# Altium PCB ASIC_test_adapter.PcbDoc
Units mm, origin at the board's own origin, x right, y up, seen from the top; angles counter-clockwise.
Board outline 49.2 x 49.2 mm, 4 copper layers (Top Layer, Layer 1, Layer 2, Bottom Layer), stack 1.539 mm thick; 19 components, 71 nets, 185 pads, 97 vias.
Unrouted connection lines stored in the file: 57.
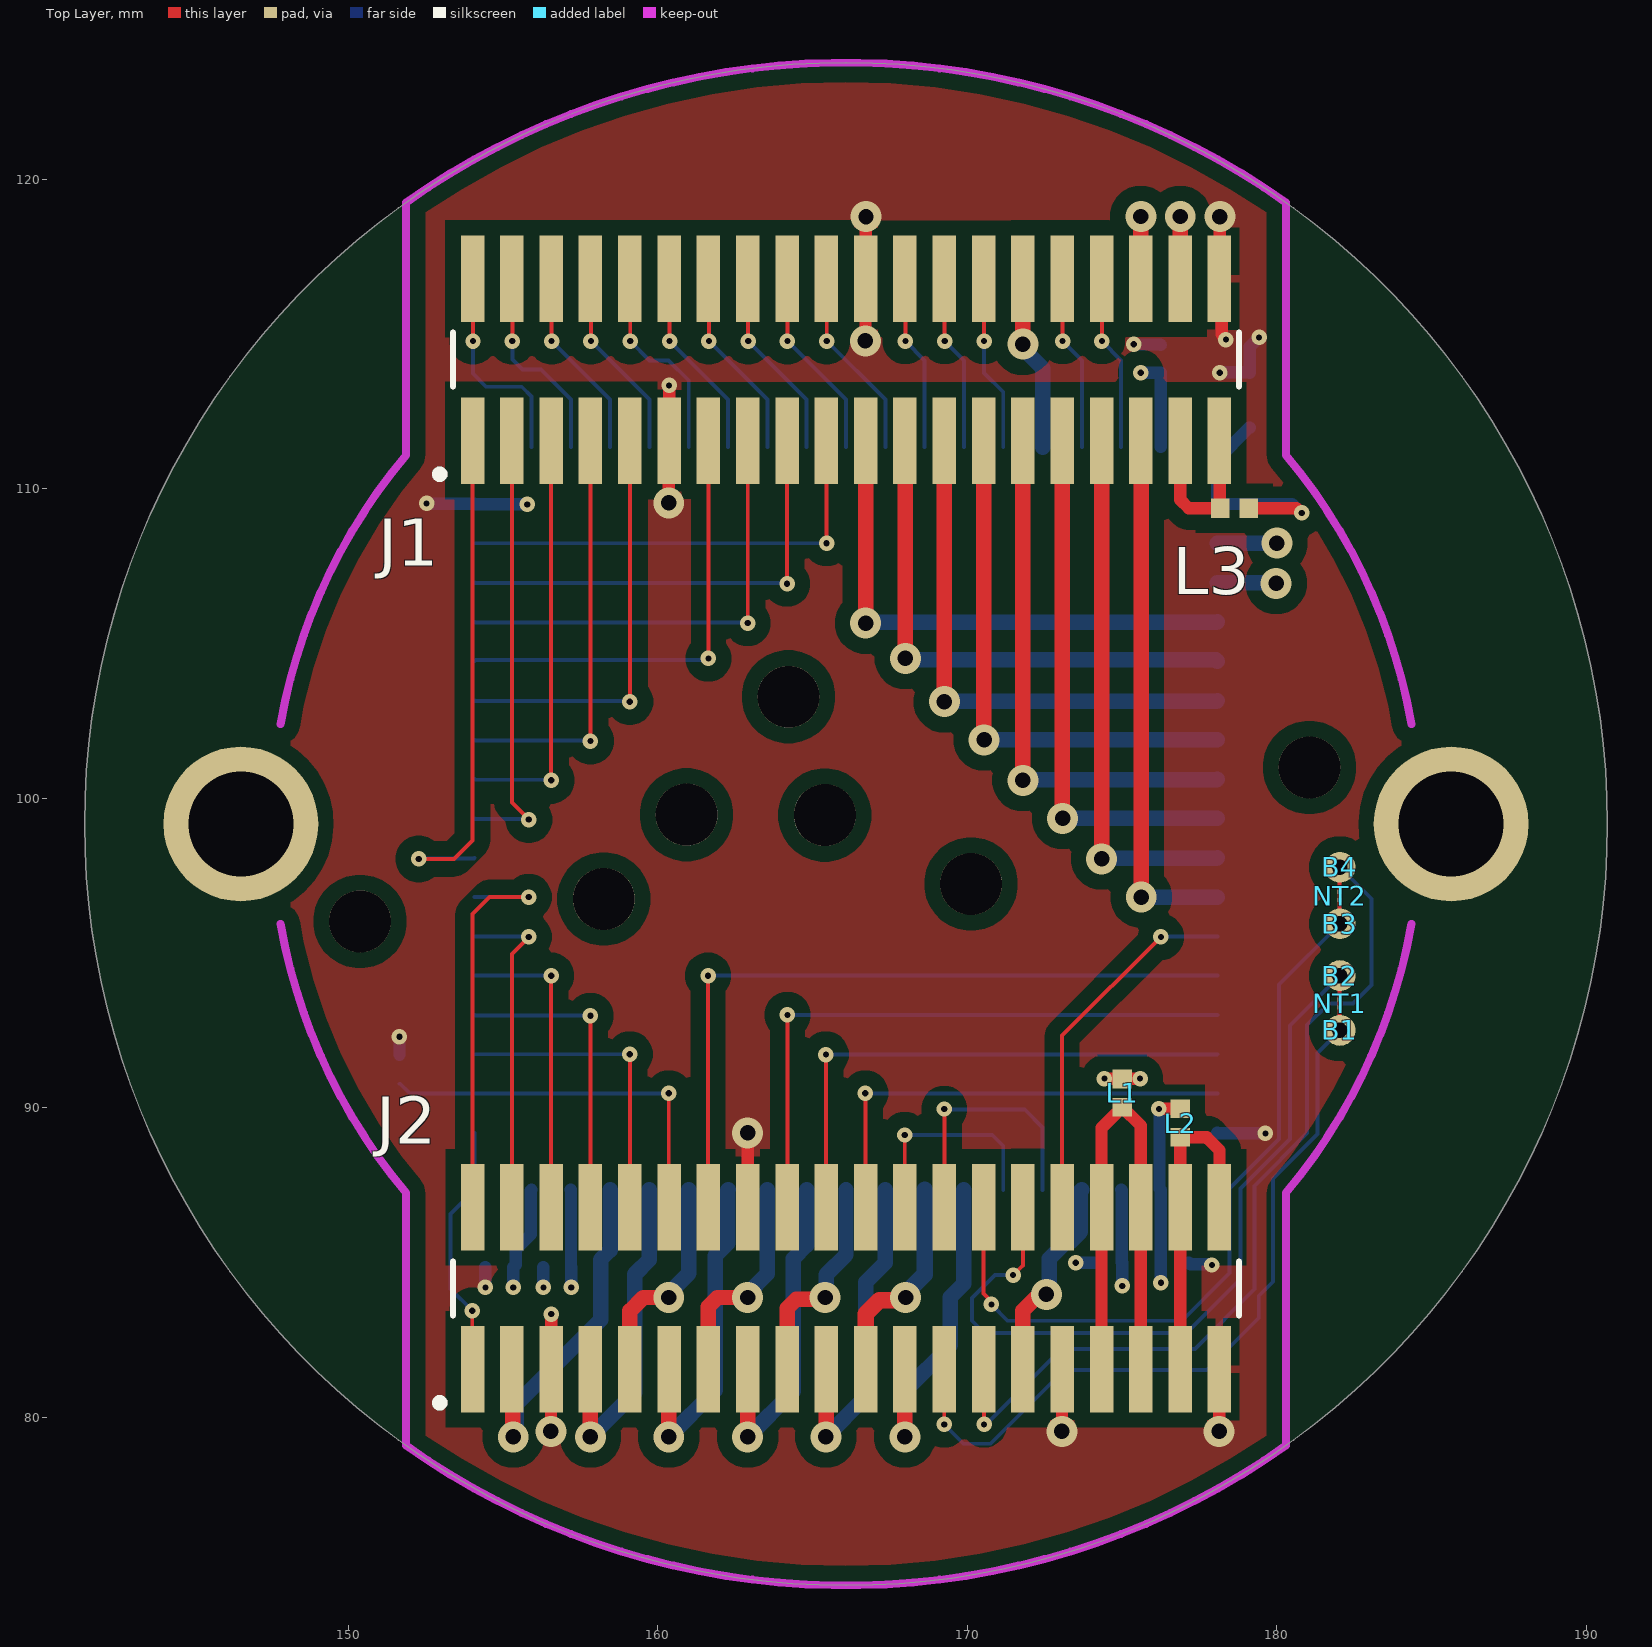
[diagram p0: Top Layer view]
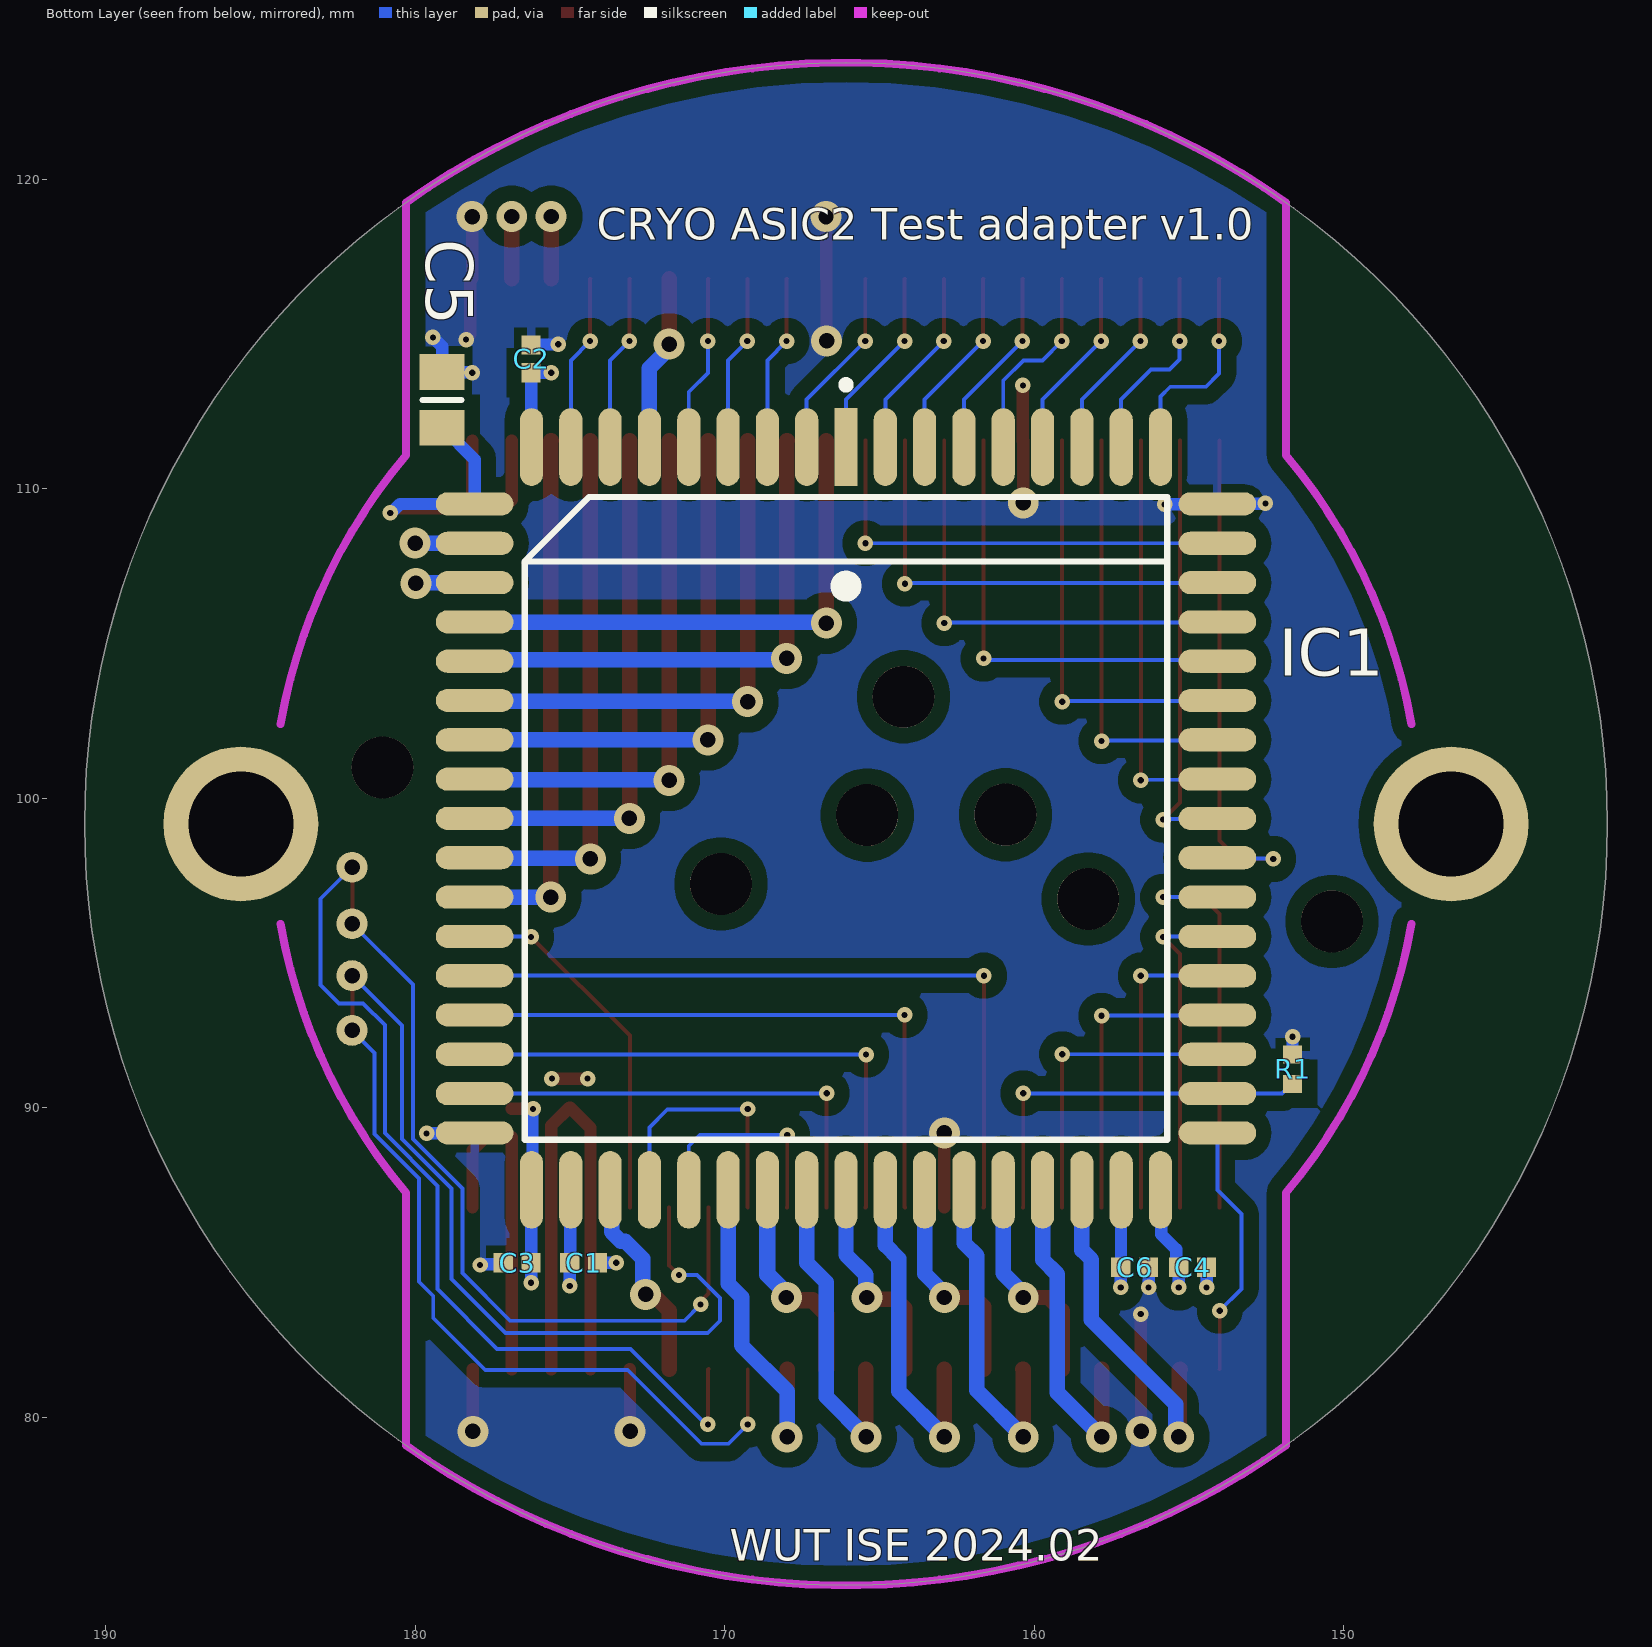
[diagram p1: Bottom Layer view, seen from below]
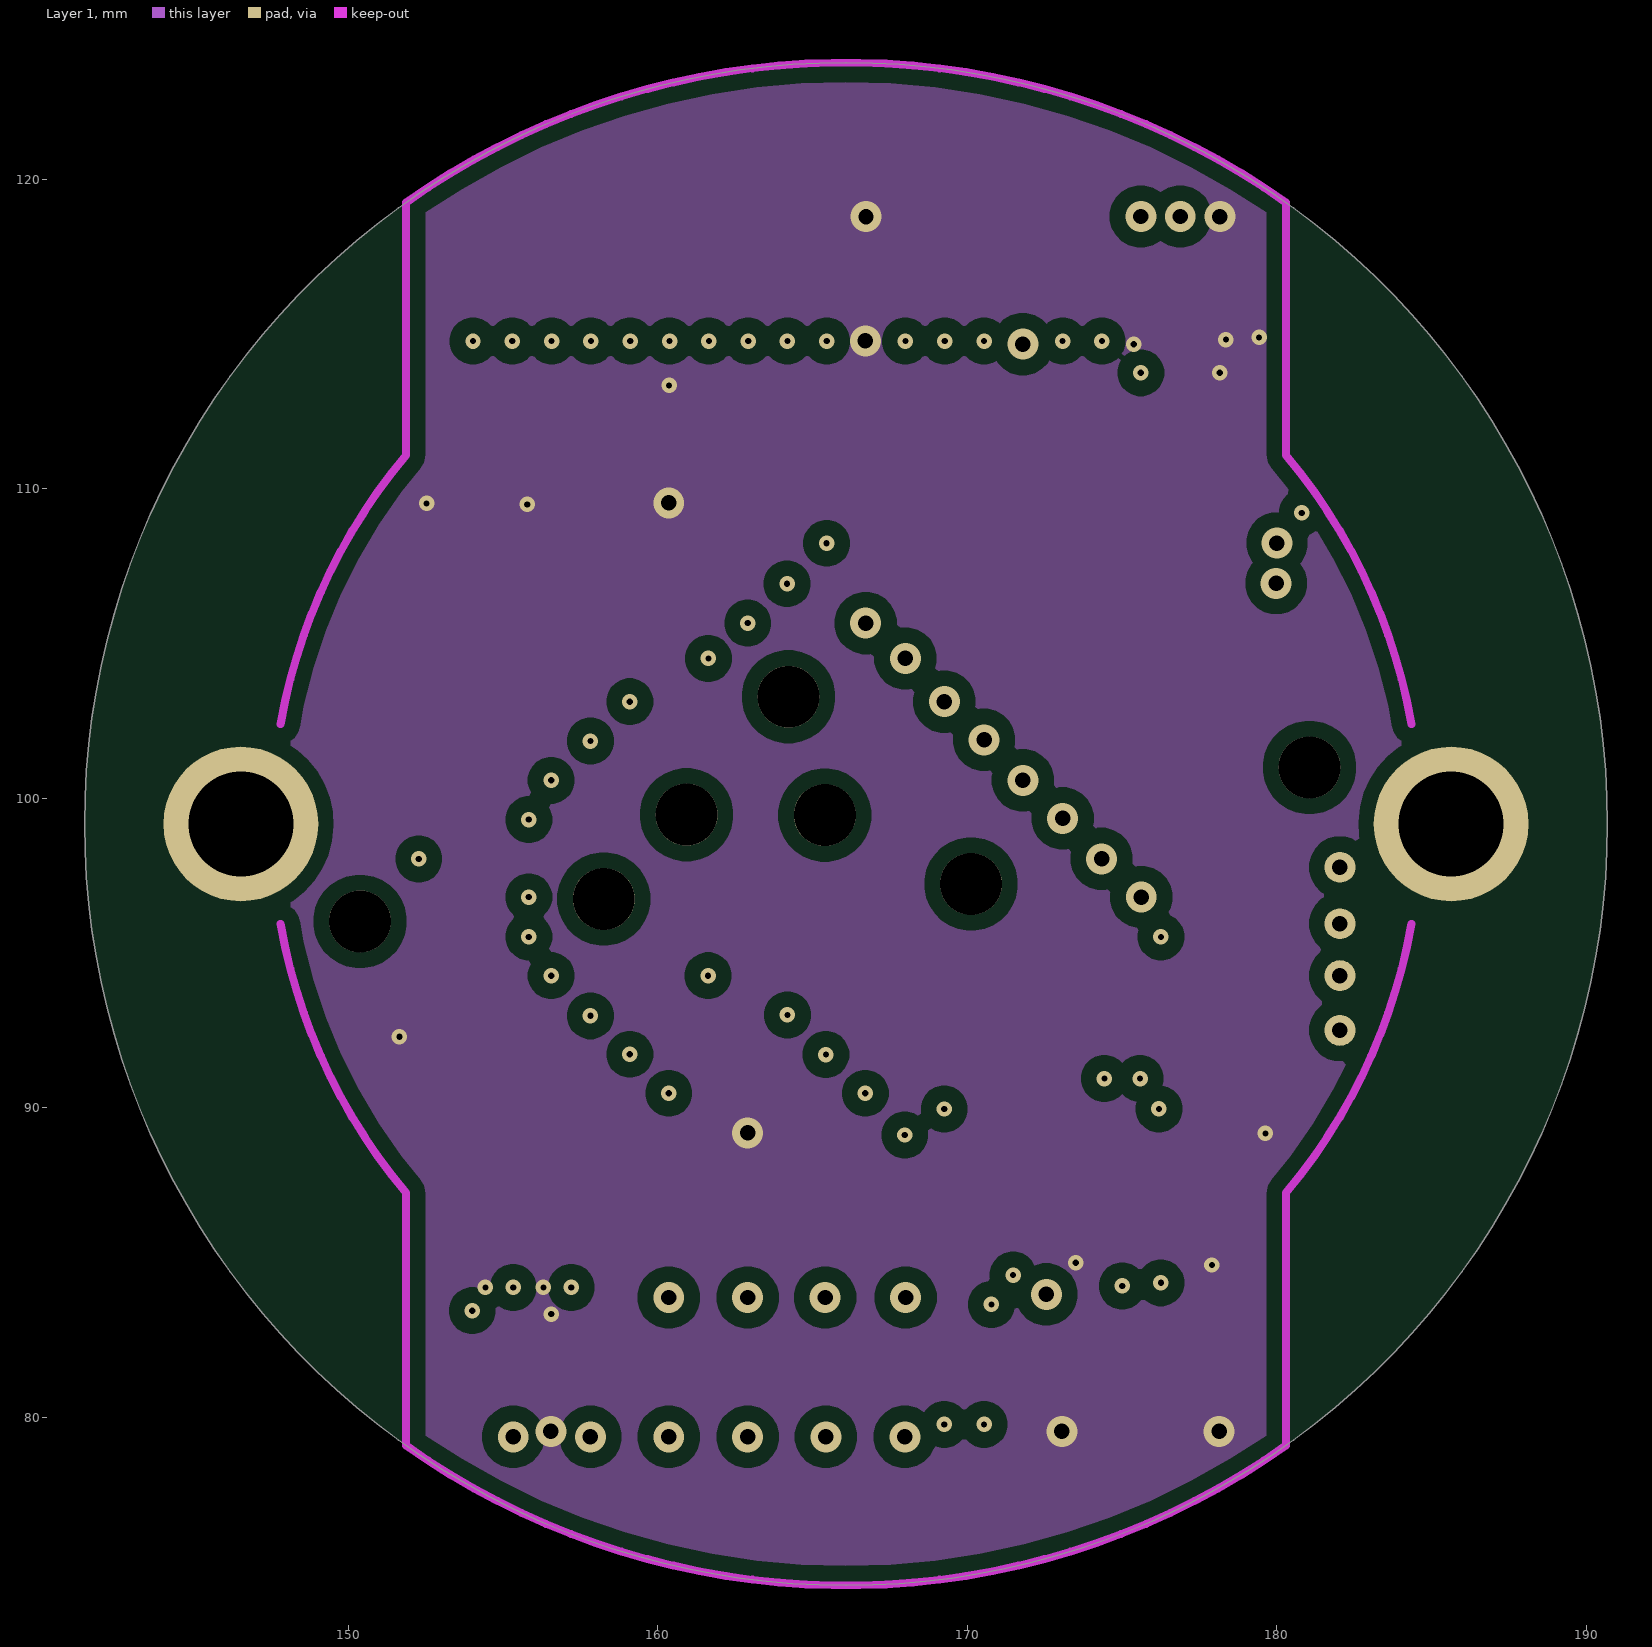
[diagram p2: Layer 1]
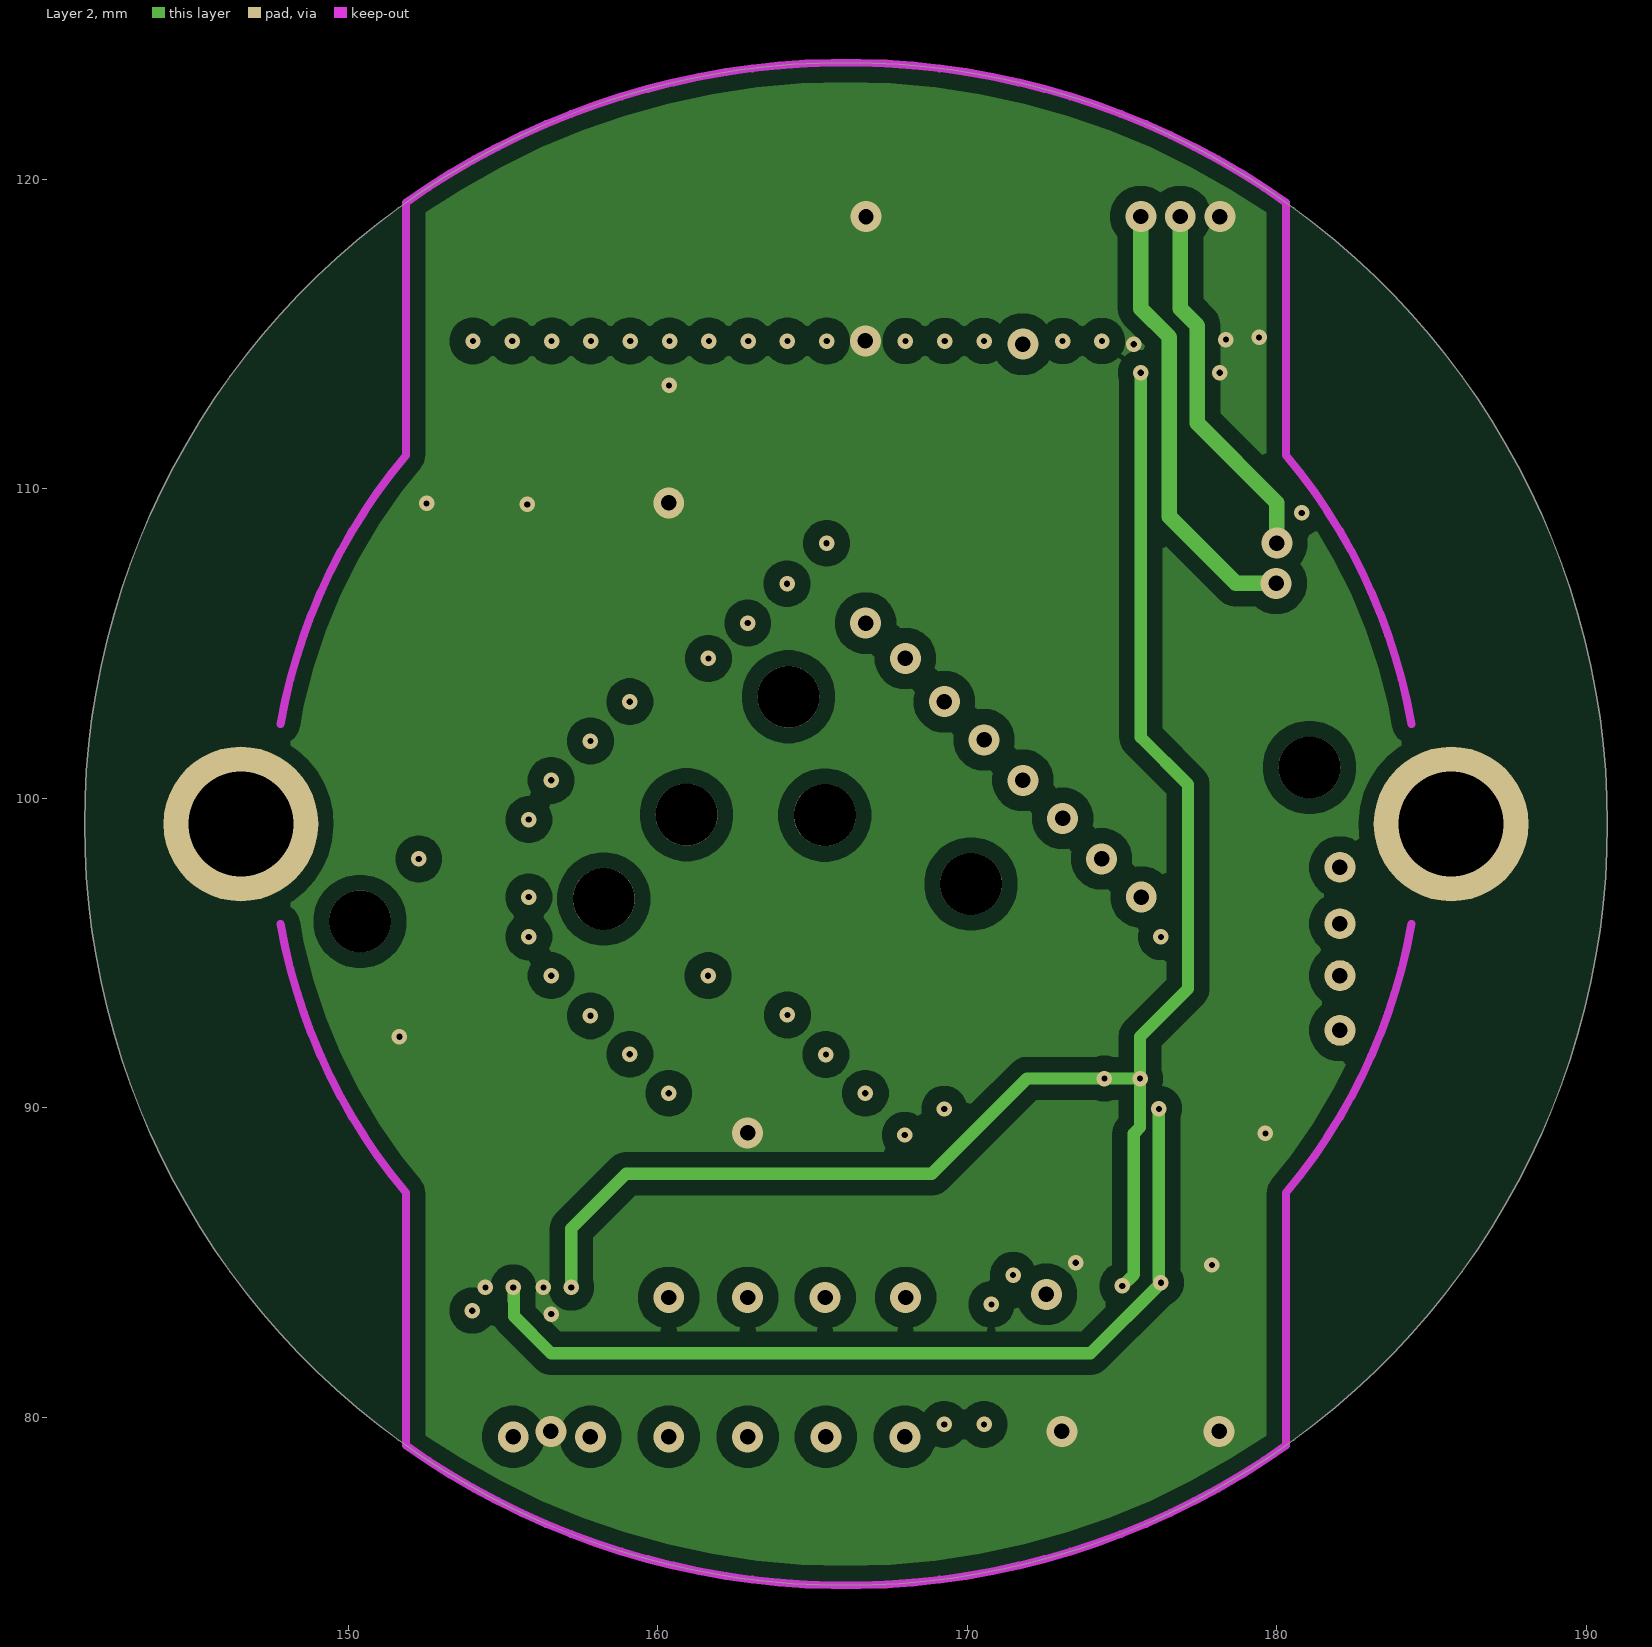
[diagram p3: Layer 2]
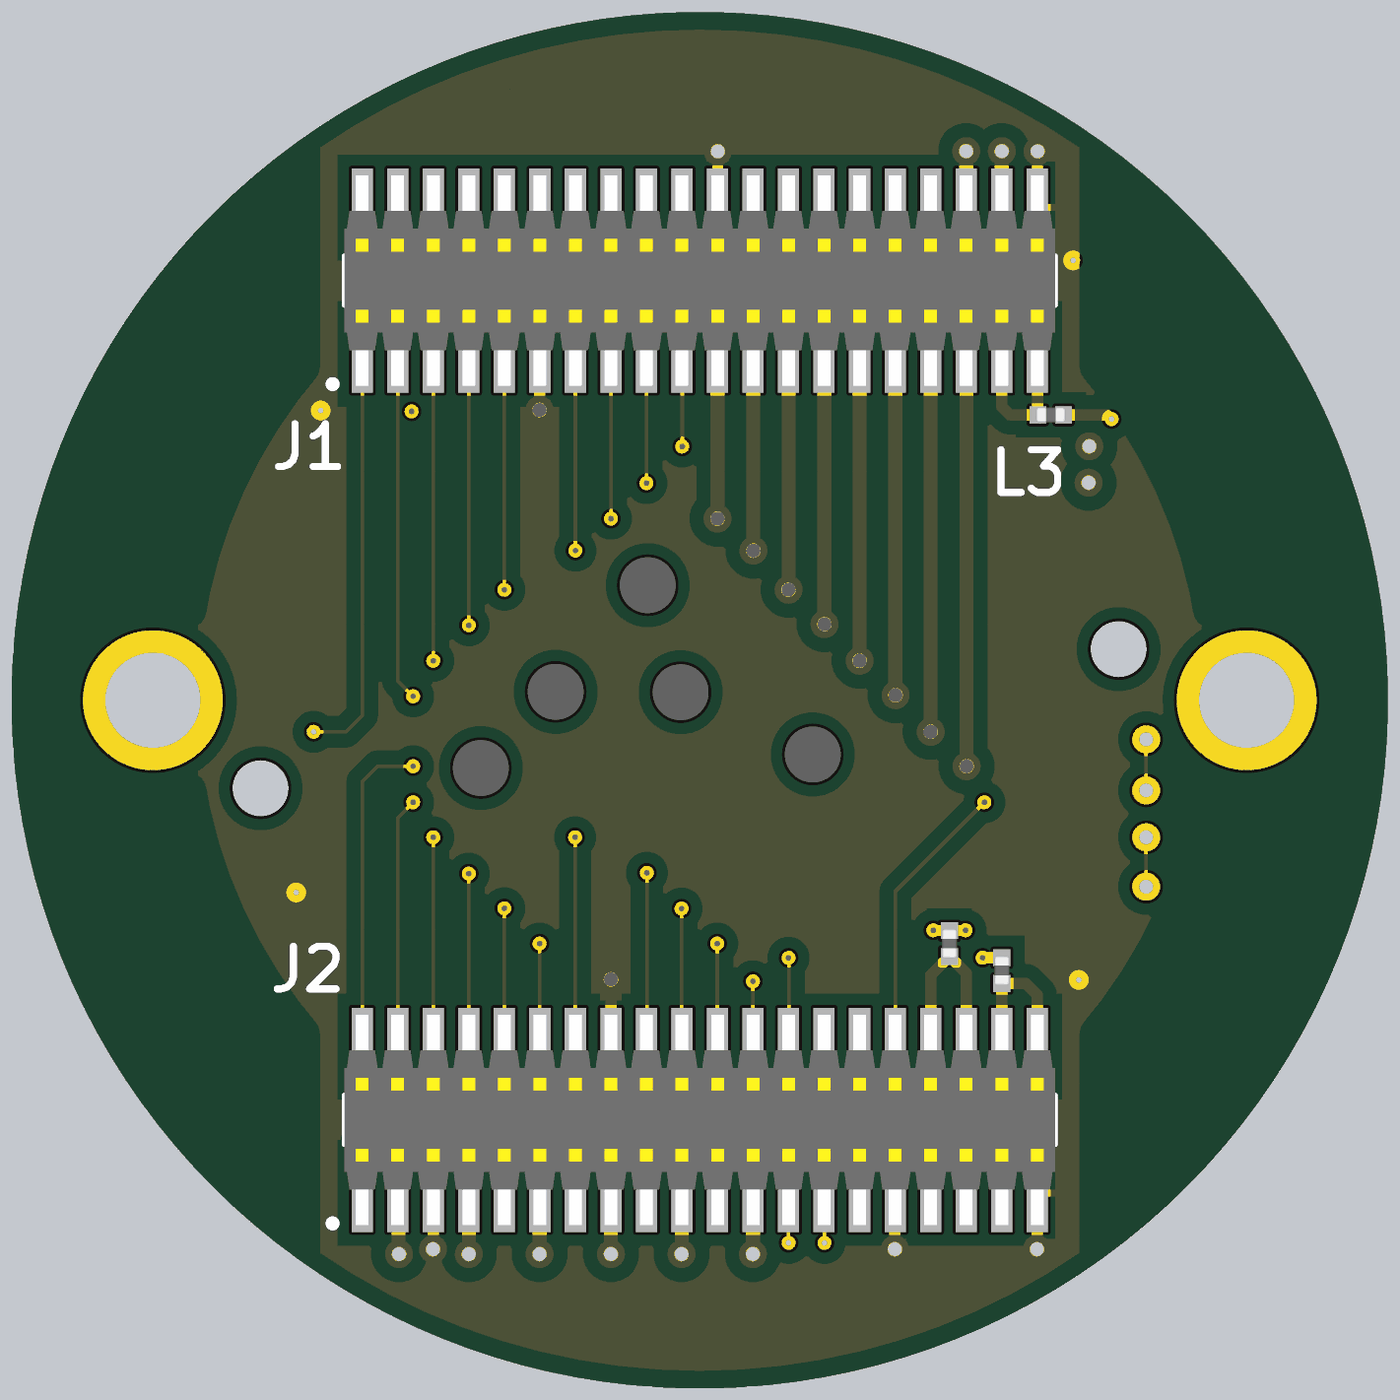
[diagram p4: 3D render of the assembled board from above, using the file's embedded part models]
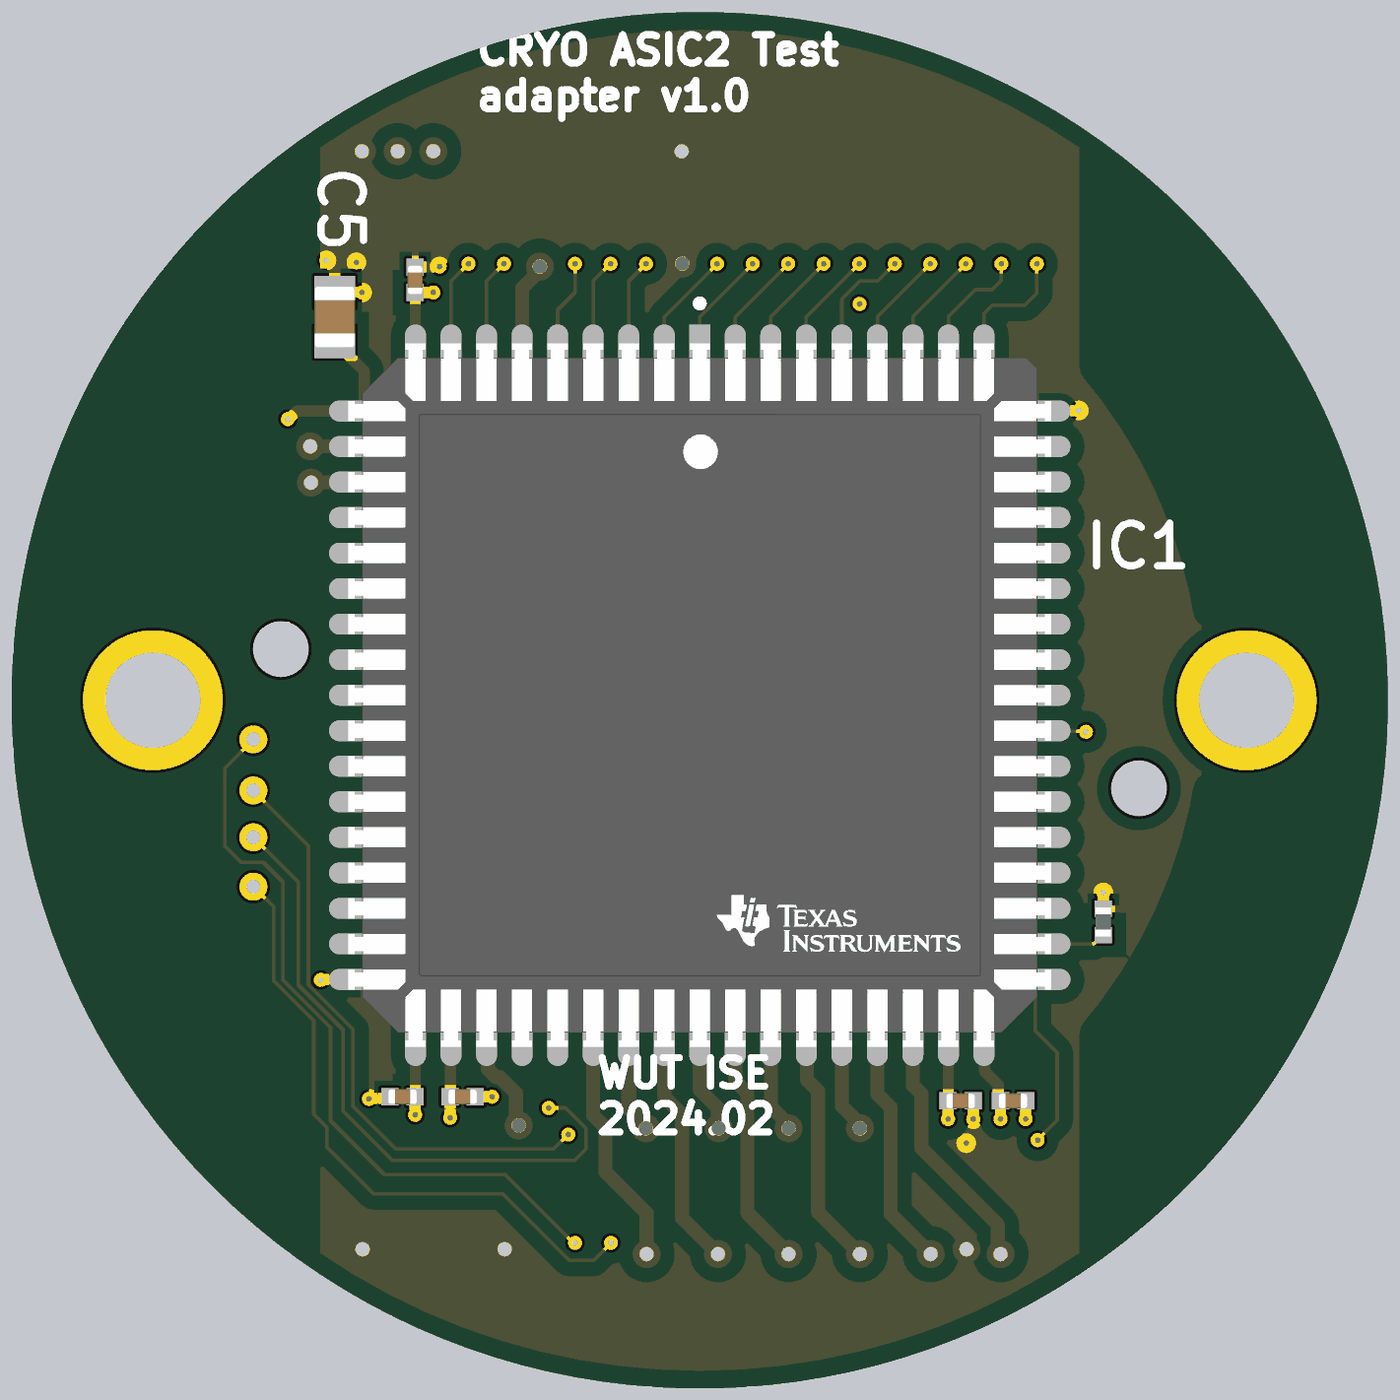
[diagram p5: 3D render of the assembled board from below, using the file's embedded part models]

## Layer stack, top to bottom
Top Solder: solder mask 0.0102, Solder Resist, Dk 3.5
Top Layer: signal copper 0.018
Dielectric 2: prepreg 0.1803, PP-021, Dk 4.7
Dielectric 4: prepreg 0.1803, PP-021, Dk 4.7
Layer 1: signal copper 0.035
Dielectric 1: core 0.7112, Core-039, Dk 4.8
Layer 2: signal copper 0.035
Dielectric 5: prepreg 0.1803, PP-021, Dk 4.7
Dielectric 3: prepreg 0.1803, PP-021, Dk 4.7
Bottom Layer: signal copper 0.018
Bottom Solder: solder mask 0.0102, Solder Resist, Dk 3.5

## Board outline
141.476,99.173 ccw(c166.076,99.173) 166.076,74.573 ccw(c166.076,99.173) 190.676,99.173 ccw(c166.076,99.173) 166.076,123.773 ccw(c166.076,99.173)

## Design rules (kind name [scope] priority, off if disabled: settings)
Clearance Clearance_1 [InNetClass('Imax30') or InNetClass('Imax45')] p1: gap=0.5 ignorepadtopadclearanceinfootprint=FALSE except(0.2: Arc-Arc Arc-Track Arc-SMDPad Arc-THPad Arc-Via Arc-Text Arc-Hole Track-Track Track-SMDPad Track-THPad Track-Via Track-Text Track-Hole SMDPad-SMDPad SMDPad-THPad SMDPad-Via SMDPad-Text SMDPad-Hole THPad-THPad THPad-Via THPad-Text THPad-Hole Via-Via Via-Text Via-Hole Text-Text Text-Hole)
Clearance [All] p2: gap=0.127 ignorepadtopadclearanceinfootprint=FALSE except(0.5: Arc-Poly Track-Poly SMDPad-Poly THPad-Poly Via-Poly Fill-Poly Poly-Poly Poly-Region Poly-Text Poly-Hole)
DiffPairsRouting [All] p1: maxlimit=0.254 minlimit=0.254 mostfreqgap=0.254 toplayer_minwidth=0.152 toplayer_maxwidth=0.381 toplayer_prefwidth=0.381 midlayer1_minwidth=0.152 midlayer1_maxwidth=0.381 midlayer1_prefwidth=0.381 midlayer2_minwidth=0.152 midlayer2_maxwidth=0.381 midlayer2_prefwidth=0.381 bottomlayer_minwidth=0.152 bottomlayer_maxwidth=0.381 bottomlayer_prefwidth=0.381 maxuncoupledlength=12.7
HoleSize [All] p1: absolutevalues=TRUE maxlimit=5.08 minlimit=0.2 maxpercent=80.000 minpercent=20.000
MinimumSolderMaskSliver [All] p1 off: minsoldermaskwidth=0.254
PolygonConnect Via [All vs IsVia] p1: connectstyle=Direct reliefconductorwidth=0.254 reliefentries=4 polygonreliefangle="90 Angle" airgapwidth=0.254
PolygonConnect [All] p2: connectstyle=Relief reliefconductorwidth=0.254 reliefentries=4 polygonreliefangle="90 Angle" airgapwidth=0.254
RoutingVias RoutingVias_1 [InNetClass('Imax30') or InNetClass('Imax45')] p1: holewidth=0.5 width=1 viastyle="Through Hole" minholewidth=0.5 minwidth=1 maxholewidth=0.5 maxwidth=1
RoutingVias [All] p2: holewidth=0.2 width=0.5 viastyle="Through Hole" minholewidth=0.2 minwidth=0.4 maxholewidth=0.711 maxwidth=1 viatemplateguid#1={C6DFBB91-ED27-42AF-86C9-B59DD49ECB67} viatemplatename#1=v50h20m0mx0
SilkToSilkClearance [All] p1 off: silktosilkclearance=0.254
SilkToSolderMaskClearance [IsPad] p1 off: minsilkscreentomaskgap=0.254 clearancetoexposedcopper=TRUE
SolderMaskExpansion [All] p1: expansion=0.102 istentingtop=FALSE
Width Width_imax45 [InNetClass('Imax45')] p1: maxlimit=1 minlimit=0.3 preferedwidth=0.5
Width Width_imax30 [InNetClass('Imax30')] p2: maxlimit=1 minlimit=0.21 preferedwidth=0.4
Width [All] p3: maxlimit=5.08 minlimit=0.127 preferedwidth=0.254
25 further rules are at their usual default settings.

## Classes and differential pairs
net class Imax45: P45V0_D16 P45V0_S16
net class Imax30: P3V3_D5 P3V3_S5 P45V0_D8 P45V0_D9 P45V0_D10 P45V0_D11 P45V0_D12 P45V0_D13 P45V0_D14 P45V0_D15 P45V0_D17 P45V0_S8 P45V0_S9 P45V0_S10 P45V0_S11 P45V0_S12 P45V0_S13 P45V0_S14 P45V0_S15 P45V0_S17
net class Imax7: DRAIN_MUX P3V3_D4 P3V3_D6 P3V3_D7 P3V3_S4 P3V3_S6 P3V3_S7
net class Imax5: P1V8_D0 P1V8_D1 P1V8_D2 P1V8_D3 P1V8_S0 P1V8_S1 P1V8_S2 P1V8_S3
net class PWR: GND P1V8 P3V3 P45V0 VDD VDD33 VDDH

## Components (designator, comment, footprint, x,y, rotation, side; value= is the part's Value field where it differs from the comment)
B1 "Plated Hole" c100h50 182.034,92.507 r90 top
B2 "Plated Hole" c100h50 182.034,94.273 r90 top
B3 "Plated Hole" c100h50 182.034,95.95 r90 top
B4 "Plated Hole" c100h50 182.034,97.775 r90 top
C1 "4.7uF" CAPC1005X55N 174.55,85 r180 bottom
C2 "1uF" CAPC1005X55N 176.25,114.2 r90 bottom
C3 "4.7uF" CAPC1005X55N 176.7,85 r0 bottom
C4 "1uF" CAPC1005X55N 154.875,84.85 r180 bottom
C5 "1uF" CAPC2013X145N 179.125,112.875 r270 bottom
C6 "1uF" CAPC1005X55N 156.75,84.85 r180 bottom
IC1 "CRYOASIC" FP-FJ0068A-IPC_A 166.076,99.353 r180 bottom
J1 "Header 40" SAMTEC_HDWM-20-54-L-D-335-SM-P 166.076,114.173 r0 top
J2 "Header 40" SAMTEC_HDWM-20-54-L-D-335-SM-P 166.076,84.173 r0 top
L1 "100nH" INDC1005X55N 175,90.475 r270 top
L2 "100nH" INDC1005X55N 176.876,89.508 r270 top
L3 "100nH" INDC1005X55N 178.625,109.375 r180 top
NT1 "Net Tie" "Net Tie" 182.025,93.5 r270 top net-tie
NT2 "Net Tie" "Net Tie" 182.025,96.975 r270 top net-tie
R1 "120k" RESC1005X40N 151.65,91.25 r270 bottom

## Footprints (in the part's own frame and the unit in brackets; to place one, negate y for a bottom-side part, rotate by r counter-clockwise, add the part's x,y. Pads: shape width x height; smd on the part's side, far side on the other; paste and mask are expansions set on the pad)
c100h50 [mm] "Plated Through Hole: Hole Dia.=0.5mm Pad Dia.=1.0mm"
  round 1 hole 0.5: 1(0,0)
CAPC1005X55N [mm] "Capacitor, Non-Polarized, Chip; 1.00mm L X 0.50mm W X 0.70mm H, IPC Medium Density"
  rect 0.62x0.62 smd: 1(-0.45,0) 2(0.45,0)
  body extent -0.52,-0.27 0.53,0.28, height 0.55
CAPC2013X145N [mm] "Capacitor, Non-Polarized, Chip; 2.00mm L X 1.25mm W X 1.45mm H, IPC Medium Density"
  rect 1.15x1.45 smd: 1(-0.9,0) 2(0.9,0)
  silkscreen extent 0,-0.63 0,0.63, body extent -1.1,-0.72 1.1,0.73, height 1.45
FP-FJ0068A-IPC_A [mm]
  rect 0.749x2.509 smd paste+0 mask+0: 1(0,11.998)
  rrect100% 0.749x2.509 smd paste+0 mask+0: 2(-1.27,11.998) 3(-2.54,11.998) 4(-3.81,11.998) 5(-5.08,11.998) 6(-6.35,11.998) 7(-7.62,11.998) 8(-8.89,11.998) 9(-10.16,11.998) 27(-10.16,-11.998) 28(-8.89,-11.998) 29(-7.62,-11.998) 30(-6.35,-11.998) 31(-5.08,-11.998) 32(-3.81,-11.998) 33(-2.54,-11.998) 34(-1.27,-11.998) 35(0,-11.998) 36(1.27,-11.998) 37(2.54,-11.998) 38(3.81,-11.998) 39(5.08,-11.998) 40(6.35,-11.998) 41(7.62,-11.998) 42(8.89,-11.998) 43(10.16,-11.998) 61(10.16,11.998) 62(8.89,11.998) 63(7.62,11.998) 64(6.35,11.998) 65(5.08,11.998) 66(3.81,11.998) 67(2.54,11.998) 68(1.27,11.998)
  rrect100% 2.509x0.749 smd paste+0 mask+0: 10(-11.998,10.16) 11(-11.998,8.89) 12(-11.998,7.62) 13(-11.998,6.35) 14(-11.998,5.08) 15(-11.998,3.81) 16(-11.998,2.54) 17(-11.998,1.27) 18(-11.998,0) 19(-11.998,-1.27) 20(-11.998,-2.54) 21(-11.998,-3.81) 22(-11.998,-5.08) 23(-11.998,-6.35) 24(-11.998,-7.62) 25(-11.998,-8.89) 26(-11.998,-10.16) 44(11.998,-10.16) 45(11.998,-8.89) 46(11.998,-7.62) 47(11.998,-6.35) 48(11.998,-5.08) 49(11.998,-3.81) 50(11.998,-2.54) 51(11.998,-1.27) 52(11.998,0) 53(11.998,1.27) 54(11.998,2.54) 55(11.998,3.81) 56(11.998,5.08) 57(11.998,6.35) 58(11.998,7.62) 59(11.998,8.89) 60(11.998,10.16)
  silkscreen extent -10.38,-10.38 10.38,14.13, body extent -12.57,-12.57 12.57,12.57, height 3.68
INDC1005X55N [mm] "Chip Inductor, 2-Leads, EIA 0402, Metric 1005, Body 1x0.5mm, 0402IPC Medium Density"
  rect 0.6x0.62 smd: 1(-0.46,0) 2(0.46,0)
  body extent -0.52,-0.27 0.53,0.28, height 0.55
"Net Tie" [mil] "SMD Net Tie"
  rect 5x5 smd paste-2.5 mask-2.5: 1(0,0) 2(10,0)
  Top Layer lines w5: 10,0 0,0
RESC1005X40N [mm] "Chip Resistor, EIA 0402, Metric 1005, Body 1.0x0.5mm, IPC Medium Density"
  rect 0.58x0.62 smd: 1(-0.47,0) 2(0.47,0)
  body extent -0.52,-0.27 0.53,0.28, height 0.4
SAMTEC_HDWM-20-54-L-D-335-SM-P [mm] "40 Contacts - Pitch 1.27mm - Dual Row Straight SMD Micro Board Stacker"
  rect 0.76x2.79 smd: 1(-12.065,-2.615) 2(-12.065,2.615) 3(-10.795,-2.615) 4(-10.795,2.615) 5(-9.525,-2.615) 6(-9.525,2.615) 7(-8.255,-2.615) 8(-8.255,2.615) 9(-6.985,-2.615) 10(-6.985,2.615) 11(-5.715,-2.615) 12(-5.715,2.615) 13(-4.445,-2.615) 14(-4.445,2.615) 15(-3.175,-2.615) 16(-3.175,2.615) 17(-1.905,-2.615) 18(-1.905,2.615) 19(-0.635,-2.615) 20(-0.635,2.615) 21(0.635,-2.615) 22(0.635,2.615) 23(1.905,-2.615) 24(1.905,2.615) 25(3.175,-2.615) 26(3.175,2.615) 27(4.445,-2.615) 28(4.445,2.615) 29(5.715,-2.615) 30(5.715,2.615) 31(6.985,-2.615) 32(6.985,2.615) 33(8.255,-2.615) 34(8.255,2.615) 35(9.525,-2.615) 36(9.525,2.615) 37(10.795,-2.615) 38(10.795,2.615) 39(12.065,-2.615) 40(12.065,2.615)
  silkscreen extent -13.25,-3.82 12.7,0.87, body extent -12.7,-3.76 12.7,3.76, height 11.05

## Part data
B1 B2 B3 B4: library part PLATED_HOLE0.5_PAD1.0, "Single Terminal Socket", Author="CERN DEM JMW", Component Type="Standard (No BOM)", ComponentHeight=0mm, CreateDate=06.01.2020, Family="Plated Hole", HelpURL=Undefined, LatestRevisionDate=06.01.2020, Mounted=No, PackageDescription="Plated Through Hole: Hole Dia.=0.5mm Pad Dia.=1.0mm", Part Description="Plated Through Hole: Hole Dia.=0.5mm Pad Dia.=1.0mm", Part Number=PLATED_HOLE0.5_PAD1.0, Pin Count=1, Sense=No, SMD=No, Socket=No, Status=None
C1 C3: library part CC0402_4.7UF_10V_10%_X5R, "Non-polarised capacitor", Case=0402, Manufacturer=GENERIC, Manufacturer1 ComponentHeight=0.65mm, Manufacturer1 Example=TDK, Manufacturer1 Part Number=C1005X5R1A475K050, Tolerance=±10%, Voltage=10V, Author="CERN DEM BC", Component Type=Standard, CreateDate=10.01.2020, HelpURL=\\cern.ch\dfs\Applications\Altium\Datasheets\CC0402_X5R_TDK_C.pdf, LatestRevisionDate=10.01.2020, Manufacturer Part Number=CC0402_4.7UF_10V_10%_X5R, Mounted=Yes, Part Description="SMD Multilayer Chip Ceramic Capacitor", Part Number=CC0402_4.7UF_10V_10%_X5R, Pin Count=2, Sense=No, SMD=Yes, Socket=No, Status=Preferred, TC=X5R
C2 C4 C6: library part CC0402_1UF_16V_10%_X5R, "Non-polarised capacitor", Case=0402, Manufacturer=GENERIC, Manufacturer1 ComponentHeight=0.55mm, Manufacturer1 Example=TDK, Manufacturer1 Part Number=C1005X5R1C105KT, Tolerance=±10%, Voltage=16V, Author="CERN DEM JLC", Component Type=Standard, CreateDate=25.10.2012, HelpURL=\\cern.ch\dfs\Applications\Altium\Datasheets\CC0402_X5R_TDK_C.pdf, LatestRevisionDate=25.10.2012, Manufacturer Part Number=CC0402_1UF_16V_10%_X5R, Mounted=Yes, Part Description="SMD Multilayer Chip Ceramic Capacitor", Part Number=CC0402_1UF_16V_10%_X5R, Pin Count=2, Sense=No, SMD=Yes, Socket=No, Status=Preferred, TC=X5R
C5: library part CC0805_1UF_100V_10%_X7S, "Non-polarised capacitor", Case=0805, Manufacturer=TDK, Manufacturer Part Number=C2012X7S2A105K125AB, Tolerance=±10%, Voltage=100V, Author="CERN DEM JLC", Component Type=Standard, ComponentHeight=1.45mm, CreateDate=12.12.2013, HelpURL=\\cern.ch\dfs\Applications\Altium\Datasheets\CC0805_X7S_TDK_C.pdf, LatestRevisionDate=20.01.2015, Mounted=Yes, Part Description="SMD Multilayer Chip Ceramic Capacitor", Part Number=CC0805_1UF_100V_10%_X7S, Pin Count=2, Sense=No, SMD=Yes, Socket=No, Status=None, TC=X7S
IC1: "CRYOASIC_TEST1"
J1 J2: library part SAMTEC_HDWM-20-54-L-D-335-SM-P, "Connector 40 Male", Manufacturer=SAMTEC, Manufacturer Part Number=HDWM-20-54-L-D-335-SM-P, Author="CERN DEM JLC", Component Type=Standard, ComponentHeight=11.05mm, CreateDate=09.01.2013, Family="Header 40", HelpURL=\\cern.ch\dfs\Applications\Altium\Datasheets\SAMTEC_HDWM-20-54-L-D-335-SM-P.pdf, LatestRevisionDate=09.01.2013, Mounted=Yes, Part Description="40 Contacts, Pitch 1.27mm, Dual Row Straight SMD Micro Board Stacker (Stacker Height = 8.509mm)", Part Number=SAMTEC_HDWM-20-54-L-D-335-SM-P, Pin Count=40, PressFit=No, Sense=No, SMD=Yes, Socket=No, Status=None, System=Connector
L1 L2 L3: library part IND0402_100NH_5%_TDK_MLJ1005, "Inductor", Case=0402, Manufacturer=TDK, Manufacturer Part Number=MLJ1005WR10J, Power=400mA, Resistance=0.30R, Tolerance=±5%, Author="CERN DEM BC", Component Type=Standard, ComponentHeight=0.55mm, CreateDate=13.07.2020, HelpURL=\\cern.ch\dfs\Applications\Altium\Datasheets\IND0402_TDK_MLJ1005.pdf, LatestRevisionDate=13.07.2020, Mounted=Yes, Part Description="SMD Inductor for Standard Circuits, MLJ Series", Part Number=IND0402_100NH_5%_TDK_MLJ1005, Pin Count=2, Sense=No, SMD=Yes, Socket=No
R1: library part R0402_120K_1%_0.0625W_100PPM, "Resistor - 1%", Case=0402, Manufacturer=GENERIC, Manufacturer1 ComponentHeight=0.4mm, Manufacturer1 Example="YAGEO PHYCOMP", Manufacturer1 Part Number=232270671204L, Power=0.0625W, Tolerance=±1%, Author="CERN DEM JLC", Component Type=Standard, CreateDate=03.12.2007, HelpURL=\\cern.ch\dfs\Applications\Altium\Datasheets\R0402_Phycomp_RC0402.pdf, LatestRevisionDate=17.10.2012, Manufacturer Part Number=R0402_120K_1%_0.0625W_100PPM, Mounted=Yes, Part Description="General Purpose Thick Film Chip Resistor", Part Number=R0402_120K_1%_0.0625W_100PPM, Pin Count=2, PressFit=No, Sense=No, SMD=Yes, Socket=No, Status="Not Recommended", TC=±100ppm/°C
NT1 NT2: Author="CERN DEM JLC", Component Type="Net Tie", ComponentHeight=0mm, CreateDate=22.03.2011, Family="Net Tie", HelpURL=Undefined, LatestRevisionDate=22.03.2011, Mounted=No, PackageDescription="2 Plated Through Hole For Coaxial Cable Link: Hole Dia.=1.4mm Pad Dia.=2.5mm", Part Description="Net Tie (2 Nets)", Part Number="Net Tie", Pin Count=2, Sense=No, SMD=No, Socket=No, Status=None

## Free pads (board coordinates)
  round 5 hole 3.4: 4(146.526,99.173) 4(185.626,99.173)
  round 2 hole 2 unplated: q1(150.375,96.025) q2(158.25,96.75) q3(160.925,99.475) q4(164.217,103.285) q5(165.393,99.46) q6(170.117,97.235) q7(181.05,101)

## Via types
v1: diameter 0.5, hole 0.2, Top Layer to Bottom Layer, 65 vias
v2: diameter 1, hole 0.5, Top Layer to Bottom Layer, 32 vias

## Nets (pads, with @x,y where several pads share a name; then routed paths per layer and width w, separated by ;. In a path a pad name is that pad's centre, name@x,y a point inside that pad or via, vN(x,y) a via of type N, cw(c..) or ccw(c..) an arc to the next point about the centre after c; other vN are vias at no path point)
BGP_OUT: IC1.46 J2.10 | length 10
  Top Layer w0.127: J2.10 v1(159.091,91.733)
  Bottom Layer w0.127: IC1.46 v1(159.091,91.733)
CLK: IC1.51 J1.1 | length 16.7
  Top Layer w0.127: v1(152.273,98.044) 153.416,98.044 154.011,98.639 J1.1
  Bottom Layer w0.127: v1(152.273,98.044) 152.292,98.063 154.058,98.063 IC1.51
DAC_OUT: IC1.44 J2.1 | length 8.3
  Top Layer w0.127: v1(154,83.45) 154,81.569 J2.1
  Bottom Layer w0.127: v1(154,83.45) 153.3,84.15 153.3,86.577 154.078,87.355 IC1.44
DATA_IN: IC1.49 J2.4 | length 10.7
  Top Layer w0.127: J2.4 155.281,94.977 v1(155.829,95.525)
  Bottom Layer w0.127: IC1.49 154.087,95.534 155.82,95.534 v1(155.829,95.525)
DATA_RDY: IC1.50 J2.2 | length 13.3
  Top Layer w0.127: J2.2 154.011,96.261 154.563,96.813 v1(155.829,96.813)
  Bottom Layer w0.127: IC1.50 v1(155.829,96.813)
DRAIN_MUX: IC1.48 J2.6 | length 10
  Top Layer w0.127: J2.6 v1(156.551,94.273)
  Bottom Layer w0.127: IC1.48 v1(156.551,94.273)
GATE_MUX: IC1.47 J2.8 | length 9.9
  Top Layer w0.127: J2.8 v1(157.821,92.975)
  Bottom Layer w0.127: IC1.47 154.092,92.989 157.807,92.989 v1(157.821,92.975)
Gnd: C1.2 C2.2 C3.2 C4.2 C5.1 C6.2 IC1.26 IC1.60 J1.11 J1.22 J1.40 J2.5 J2.16 J2.31 J2.39 R1.1 | length 33.2
  Top Layer w0.4: v2@156.545,79.555 J2.5@156.545,81.552 ; J2.5 v1(156.551,83.341) ; v2@160.355,109.555 J1.11@160.355,111.552 ; J1.11 v1(160.361,113.341) ; J2.16 v2(162.901,89.193) ; v2@166.705,114.786 J1.22@166.705,116.783 ; J1.22@166.716,116.794 v2@166.716,118.791 ; v2(173.05,79.55) 173.055,79.555 173.055,81.552 J2.31 ; v2@178.135,79.555 J2.39@178.135,81.552 ; J1.40 178.211,116.718 178.211,114.991 178.35,114.852 v1(178.35,114.825) ; J1.40@178.146,116.793 v2@178.146,118.79
  Bottom Layer w0.4: R1.1 v1(151.65,92.3) ; v1@152.536,109.522 IC1.60@154.069,109.522 ; IC1.60@154.087,109.504 154.089,109.506 155.768,109.506 v1(155.775,109.5) ; v1(154.425,84.2) C4.2 ; v1(156.3,84.2) C6.2 ; v1(173.5,85) C1.2 ; v1(175.375,114.675) 175.388,114.662 176.238,114.662 C2.2 ; C3.2 177.206,84.944 177.881,84.944 v1(177.9,84.925) ; IC1.26 178.083,89.184 179.616,89.184 v1(179.625,89.175) ; v1(178.15,113.75) 178.163,113.763 179.087,113.763 C5.1@179.1,113.75 ; C5.1@179.125,113.75 179.125,114.598 v1(179.422,114.895)
  other v1: 152.527,109.531
  other v2: 156.54,79.55 178.13,79.55 160.35,109.55 166.7,114.78 166.722,118.796 178.152,118.796
ICS_OUT: IC1.45 J2.12 R1.2 | length 12.5
  Top Layer w0.127: v1(160.35,90.475) 160.35,86.799 J2.12
  Bottom Layer w0.127: R1.2 151.67,90.78 151.987,90.463 IC1.45 154.084,90.469 160.344,90.469 v1(160.35,90.475)
MUX_PN_OUT: IC1.57 J1.15 | length 14.7
  Top Layer w0.127: v1(162.901,105.664) J1.15
  Bottom Layer w0.127: IC1.57 154.097,105.683 162.881,105.683 v1(162.901,105.664)
P1V8: C1.1 C2.1 C6.1 IC1.9 IC1.28 IC1.42 L1.1 | length 63.8
  Top Layer w0.4: v1(174.425,90.95) 174.433,90.943 174.992,90.943 L1.1 175.008,90.943 175.568,90.943 v1(175.575,90.95)
  Layer 2 w0.4: v1(157.2,84.2) 157.2,86.1 158.975,87.875 168.85,87.875 171.925,90.95 v1(174.425,90.95) v1(175.575,90.95) ; v1(175,84.248) 175.375,84.623 175.375,89.175 175.575,89.375 v1(175.575,90.95) ; v1(175.6,113.75) 175.6,101.975 177.125,100.45 177.125,93.85 175.575,92.3 v1(175.575,90.95)
  Bottom Layer w0.4: IC1.42 157.193,87.348 157.193,84.857 C6.1 v1(157.2,84.2) ; IC1.28 174.983,87.338 174.983,85.017 C1.1 v1(175,84.248) ; v1(175.6,113.75) C2.1 176.243,113.743 176.243,111.358 IC1.9
P1V8_D0: IC1.1 J1.18 | length 6.2
  Top Layer w0.127: J1.18 164.185,116.774 v1(164.185,114.775)
  Bottom Layer w0.127: v1(164.185,114.775) 166.076,112.884 IC1.1
P1V8_D1: IC1.2 J1.20 | length 6.2
  Top Layer w0.127: J1.20 165.455,116.774 v1(165.455,114.775)
  Bottom Layer w0.127: v1(165.455,114.775) 167.346,112.884 IC1.2
P1V8_D2: IC1.3 J1.24 | length 5.7
  Top Layer w0.127: J1.24 167.995,116.774 v1(167.995,114.775)
  Bottom Layer w0.127: v1(167.995,114.775) 168.616,114.154 IC1.3
P1V8_D3: IC1.4 J1.26 | length 5.7
  Top Layer w0.127: J1.26 169.265,116.774 v1(169.265,114.775)
  Bottom Layer w0.127: v1(169.265,114.775) 169.886,114.154 IC1.4
P1V8_G0: IC1.61 J1.2 | length 6.9
  Top Layer w0.127: J1.2 154.025,116.774 v1(154.025,114.775)
  Bottom Layer w0.127: v1(154.025,114.775) 154.025,113.725 154.45,113.3 155.6,113.3 155.916,112.984 IC1.61
P1V8_G1: IC1.62 J1.4 | length 6.6
  Top Layer w0.127: J1.4 155.295,116.774 v1(155.295,114.775)
  Bottom Layer w0.127: v1(155.295,114.775) 155.295,114.18 155.625,113.85 156.225,113.85 157.186,112.889 IC1.62
P1V8_S0: IC1.21 J2.32 | length 11.9
  Top Layer w0.127: J2.32 173.061,92.336 v1(176.25,95.525)
  Bottom Layer w0.127: v1(176.25,95.525) 176.259,95.534 178.065,95.534 IC1.21
P1V8_S1: IC1.22 J2.14 | length 23.9
  Top Layer w0.127: v1(161.62,94.273) 161.62,86.799 J2.14
  Bottom Layer w0.127: v1(161.62,94.273) IC1.22
P1V8_S2: IC1.23 J2.18 | length 20.1
  Top Layer w0.127: J2.18 164.185,86.802 v1(164.185,93.003)
  Bottom Layer w0.127: v1(164.185,93.003) IC1.23
P1V8_S3: IC1.24 J2.20 | length 17.6
  Top Layer w0.127: v1(165.425,91.725) 165.425,86.804 J2.20
  Bottom Layer w0.127: v1(165.425,91.725) 165.429,91.729 178.07,91.729 IC1.24
P3V3: C3.1 C4.1 IC1.27 IC1.43 L2.1 | length 38.7
  Top Layer w0.4: v1(176.186,89.968) L2.1
  Layer 2 w0.4: v1(155.325,84.2) 155.344,84.181 155.344,83.775 155.35,83.769 155.35,83.275 156.55,82.075 173.975,82.075 v1(176.25,84.35) 176.25,84.377 176.186,84.441 v1(176.186,89.968)
  Bottom Layer w0.4: v1(155.325,84.2) C4.1 155.409,84.934 155.409,85.434 155.894,85.919 155.894,87.333 IC1.43 ; v1(176.186,89.968) 176.205,89.949 176.205,87.386 IC1.27 176.243,87.348 176.243,85.007 C3.1 v1(176.25,84.35)
P3V3_D4: IC1.5 J1.28 | length 5.7
  Top Layer w0.127: J1.28 170.535,116.774 v1(170.535,114.775)
  Bottom Layer w0.127: v1(170.535,114.775) 170.535,113.75 171.156,113.129 IC1.5
P3V3_D5: IC1.6 J1.30 | length 5.7
  Top Layer w0.5: v2(171.791,114.675) J1.30
  Bottom Layer w0.5: v2(171.791,114.675) 171.791,114.54 172.426,113.905 IC1.6
P3V3_D6: IC1.7 J1.32 | length 5.7
  Top Layer w0.127: J1.32 173.075,116.774 v1(173.075,114.775)
  Bottom Layer w0.127: v1(173.075,114.775) 173.696,114.154 IC1.7
P3V3_D7: IC1.8 J1.34 | length 5.7
  Top Layer w0.127: J1.34 174.345,116.774 v1(174.345,114.775)
  Bottom Layer w0.127: v1(174.345,114.775) 174.966,114.154 IC1.8
P3V3_G2: IC1.63 J1.6 | length 6.2
  Top Layer w0.127: J1.6 156.565,116.774 v1(156.565,114.775)
  Bottom Layer w0.127: v1(156.565,114.775) 158.456,112.884 IC1.63
P3V3_G3: IC1.64 J1.8 | length 6.2
  Top Layer w0.127: J1.8 157.835,116.774 v1(157.835,114.775)
  Bottom Layer w0.127: v1(157.835,114.775) 159.726,112.884 IC1.64
P3V3_S4: IC1.25 J2.22 | length 15.1
  Top Layer w0.127: v1(166.7,90.475) 166.7,86.799 J2.22
  Bottom Layer w0.127: v1(166.7,90.475) 166.706,90.469 178.068,90.469 IC1.25
P3V3_S5: IC1.29 J2.29 | length 6.8
  Top Layer w0.5: J2.29 171.791,83.451 172.219,83.879 172.454,83.879 v2(172.55,83.975)
  Bottom Layer w0.5: v2(172.55,83.975) 172.646,84.071 172.646,85.136 173.21,85.7 173.355,85.7 173.648,85.993 173.648,87.307 IC1.29
P3V3_S6: IC1.30 J2.26 | length 8.6
  Top Layer w0.127: v1(169.25,89.965) 169.265,89.95 169.265,86.802 J2.26
  Bottom Layer w0.127: v1(169.25,89.965) 169.265,89.95 171.85,89.95 172.426,89.374 IC1.30
P3V3_S7: IC1.31 J2.24 | length 7.1
  Top Layer w0.127: v1(167.975,89.125) 167.975,86.794 J2.24
  Bottom Layer w0.127: v1(167.975,89.125) 170.8,89.125 171.156,88.769 IC1.31
P18V0_G4: IC1.65 J1.10 | length 6.6
  Top Layer w0.127: J1.10 159.105,116.774 v1(159.105,114.775)
  Bottom Layer w0.127: v1(159.105,114.775) 159.726,114.154 160.346,114.154 160.996,113.504 IC1.65
P18V0_G5: IC1.66 J1.12 | length 6.2
  Top Layer w0.127: J1.12 160.375,116.774 v1(160.375,114.775)
  Bottom Layer w0.127: v1(160.375,114.775) 162.266,112.884 IC1.66
P18V0_G6: IC1.67 J1.14 | length 6.2
  Top Layer w0.127: J1.14 161.645,116.774 v1(161.645,114.775)
  Bottom Layer w0.127: v1(161.645,114.775) 163.536,112.884 IC1.67
P18V0_G7: IC1.68 J1.16 | length 6.2
  Top Layer w0.127: J1.16 162.915,116.774 v1(162.915,114.775)
  Bottom Layer w0.127: v1(162.915,114.775) 164.806,112.884 IC1.68
P45V0: C5.2 IC1.10 L3.1 | length 7.5
  Top Layer w0.4: L3.1 180.623,109.375 180.773,109.225 v1(180.8,109.225)
  Bottom Layer w0.4: C5.2 179.1,111.975 178.074,110.949 IC1.10 180.485,109.513 180.773,109.225 v1(180.8,109.225)
P45V0_D8: IC1.11 J1.38 | length 15.8
  Top Layer w0.5: J1.38 176.873,116.79 176.873,118.798 v2(176.875,118.8)
  Layer 2 w0.5: v2(176.875,118.8) 176.875,115.825 177.425,115.275 177.425,112.125 180,109.55 v2(180,108.25)
  Bottom Layer w0.5: IC1.11 178.078,108.246 179.997,108.246 v2(180,108.25)
P45V0_D9: IC1.12 J1.36 | length 18.3
  Top Layer w0.5: J1.36 J1.36 v2(175.6,118.8)
  Layer 2 w0.5: v2(175.6,118.8) 175.6,115.825 176.525,114.9 176.525,109.1 178.675,106.95 v2(179.975,106.95)
  Bottom Layer w0.5: IC1.12 178.086,106.961 179.964,106.961 v2(179.975,106.95)
P45V0_D10: IC1.13 J1.21 | length 17.3
  Top Layer w0.5: v2(166.711,105.664) J1.21
  Bottom Layer w0.5: v2(166.711,105.664) 166.73,105.683 178.055,105.683 IC1.13
P45V0_D11: IC1.14 J1.23 | length 17.2
  Top Layer w0.5: J1.23 167.988,111.551 167.988,104.528 v2(167.995,104.521)
  Bottom Layer w0.5: v2(167.995,104.521) 168.039,104.477 178.03,104.477 IC1.14
P45V0_D12: IC1.15 J1.25 | length 17.3
  Top Layer w0.5: v2(169.251,103.124) J1.25
  Bottom Layer w0.5: v2(169.251,103.124) 169.27,103.143 178.055,103.143 IC1.15
P45V0_D13: IC1.16 J1.27 | length 17.2
  Top Layer w0.5: J1.27 170.528,111.551 170.528,101.9 v2(170.535,101.893)
  Bottom Layer w0.5: v2(170.535,101.893) IC1.16
P45V0_D14: IC1.17 J1.29 | length 17.3
  Top Layer w0.5: v2(171.791,100.584) J1.29
  Bottom Layer w0.5: v2(171.791,100.584) 171.81,100.603 178.055,100.603 IC1.17
P45V0_D15: IC1.18 J1.31 | length 17.2
  Top Layer w0.5: J1.31 173.068,111.551 173.068,99.36 v2(173.075,99.353)
  Bottom Layer w0.5: v2(173.075,99.353) IC1.18
P45V0_D16: IC1.19 J1.33 | length 17.3
  Top Layer w0.5: v2(174.331,98.044) J1.33
  Bottom Layer w0.5: v2(174.331,98.044) 174.35,98.063 178.055,98.063 IC1.19
P45V0_D17: IC1.20 J1.35 | length 17.2
  Top Layer w0.5: J1.35 175.608,111.551 175.608,96.82 v2(175.615,96.813)
  Bottom Layer w0.5: v2(175.615,96.813) IC1.20
P45V0_S8: IC1.32 J2.23 | length 11
  Top Layer w0.5: v2(167.975,79.375) 167.978,79.378 167.978,81.555 J2.23
  Bottom Layer w0.5: v2(167.975,79.375) 167.975,80.85 169.45,82.325 169.45,83.889 169.886,84.325 IC1.32
P45V0_S9: IC1.33 J2.21 | length 7
  Top Layer w0.54: J2.21 166.711,83.341 167.157,83.787 167.912,83.787 v2(168,83.875)
  Bottom Layer w0.54: v2(168,83.875) 168,83.999 168.616,84.615 IC1.33
P45V0_S10: IC1.34 J2.19 | length 11
  Top Layer w0.5: v2(165.425,79.375) 165.433,79.383 165.433,81.55 J2.19
  Bottom Layer w0.5: v2(165.425,79.375) 166.711,80.661 166.711,84.365 167.346,85 IC1.34
P45V0_S11: IC1.35 J2.17 | length 7.1
  Top Layer w0.5: J2.17 164.171,83.521 164.475,83.825 165.35,83.825 v2(165.4,83.875)
  Bottom Layer w0.5: v2(165.4,83.875) 165.434,83.909 165.434,84.609 166.076,85.251 IC1.35
P45V0_S12: IC1.36 J2.15 | length 11
  Top Layer w0.5: v2(162.901,79.375) J2.15
  Bottom Layer w0.5: v2(162.901,79.375) 164.375,80.849 164.375,85.135 164.806,85.566 IC1.36
P45V0_S13: IC1.37 J2.13 | length 7.2
  Top Layer w0.5: J2.13 161.631,83.582 161.924,83.875 v2(162.901,83.875)
  Bottom Layer w0.5: v2(162.901,83.875) 162.901,84.01 163.536,84.645 IC1.37
P45V0_S14: IC1.38 J2.11 | length 11
  Top Layer w0.5: v2(160.35,79.375) 160.355,79.38 160.355,81.553 J2.11
  Bottom Layer w0.5: v2(160.35,79.375) 161.85,80.875 161.85,85.224 162.25,85.624 162.25,87.339 IC1.38
P45V0_S15: IC1.39 J2.9 | length 7.1
  Top Layer w0.5: J2.9 159.091,83.441 159.525,83.875 v2(160.35,83.875)
  Bottom Layer w0.5: v2(160.35,83.875) 160.35,84.01 160.996,84.656 IC1.39
P45V0_S16: IC1.40 J2.7 | length 11
  Top Layer w0.5: v2(157.821,79.375) J2.7
  Bottom Layer w0.5: v2(157.821,79.375) 159.25,80.804 159.25,84.625 159.725,85.1 159.725,87.354 IC1.40
P45V0_S17: IC1.41 J2.3 | length 11.5
  Top Layer w0.5: J2.3 155.303,81.536 155.303,79.397 v2(155.325,79.375)
  Bottom Layer w0.5: v2(155.325,79.375) 155.421,79.471 155.421,80.421 158.15,83.15 158.15,85.1 158.456,85.406 IC1.41
SPI_CSn: IC1.53 J1.5 | length 13.5
  Top Layer w0.127: v1(156.551,100.584) J1.5
  Bottom Layer w0.127: IC1.53 154.097,100.603 156.531,100.603 v1(156.551,100.584)
SPI_MISO: IC1.52 J1.3 | length 14.2
  Top Layer w0.127: J1.3 155.281,99.862 v1(155.829,99.314)
  Bottom Layer w0.127: IC1.52 154.097,99.333 155.81,99.333 v1(155.829,99.314)
SPI_MOSI: IC1.54 J1.7 | length 13.5
  Top Layer w0.127: v1(157.821,101.854) J1.7
  Bottom Layer w0.127: IC1.54 154.097,101.873 157.801,101.873 v1(157.821,101.854)
SYNC_IO_N: IC1.59 J1.19 | length 14.7
  Top Layer w0.127: J1.19 165.45,111.549 v1(165.45,108.243)
  Bottom Layer w0.127: IC1.59 v1(165.45,108.243)
SYNC_IO_P: IC1.58 J1.17 | length 14.7
  Top Layer w0.127: v1(164.171,106.934) J1.17
  Bottom Layer w0.127: IC1.58 154.097,106.953 164.151,106.953 v1(164.171,106.934)
SYNC_UNI_IN: IC1.55 J1.9 | length 13.5
  Top Layer w0.127: v1(159.091,103.124) J1.9
  Bottom Layer w0.127: IC1.55 154.097,103.143 159.071,103.143 v1(159.091,103.124)
SYNC_UNI_OUT: IC1.56 J1.13 | length 14.6
  Top Layer w0.127: v1(161.631,104.521) J1.13
  Bottom Layer w0.127: IC1.56 154.122,104.477 161.587,104.477 v1(161.631,104.521)
Thermometer_1_1: B1.1 J2.25 NT1.2 | length 25
  Top Layer w0.127: v1(169.251,79.775) J2.25 ; NT1.2 182.025,92.516 B1.1
  Bottom Layer w0.127: v1(169.251,79.775) 169.876,79.15 170.75,79.15 173.128,81.528 177.731,81.528 179.412,83.209 179.412,83.923 179.873,84.384 179.873,87.717 181.308,89.152 181.308,91.781 B1.1
Thermometer_1_2: B2.1 J2.30 NT1.1 | length 26.2
  Top Layer w0.127: v1(171.475,84.6) 171.791,84.916 J2.30 ; NT1.1 182.025,94.264 B2.1
  Bottom Layer w0.127: v1(171.475,84.6) 170.887,84.6 170.15,83.863 170.15,83.125 170.544,82.731 177.081,82.731 178.825,84.476 178.825,87.393 180.425,88.993 180.425,92.664 B2.1
Thermometer_1_3: B3.1 J2.28 NT2.2 | length 25.3
  Top Layer w0.127: J2.28 170.521,84.005 170.775,83.751 v1(170.775,83.65) ; NT2.2 182.025,95.959 B3.1
  Bottom Layer w0.127: v1(170.775,83.65) 171.3,83.125 176.925,83.125 178.471,84.671 178.471,87.398 180.065,88.993 180.065,93.982 B3.1
Thermometer_1_4: B4.1 J2.27 NT2.1 | length 29.2
  Top Layer w0.127: J2.27@170.51,81.569 170.535,81.544 v1(170.535,79.775) ; NT2.1 182.025,97.766 B4.1
  Bottom Layer w0.127: v1(170.535,79.775) 170.6,79.775 173.041,82.216 177.346,82.216 179.275,84.145 179.275,87.484 180.975,89.184 180.975,92.675 181.675,93.375 182.45,93.375 183.05,93.975 183.05,96.759 B4.1
VDD: J2.33 J2.34 J2.35 J2.36 L1.2 | length 17.5
  Top Layer w0.4: J2.33 J2.34 174.331,89.356 174.99,90.015 L1.2 175.01,90.015 175.601,89.424 J2.36 ; J2.35 J2.36
VDD33: J2.37 J2.38 J2.40 L2.2 | length 10.8
  Top Layer w0.4: J2.37 J2.38 176.873,86.791 176.873,89.045 L2.2 177.727,89.048 177.899,88.875 178.141,88.634 J2.40
VDDH: J1.37 J1.39 L3.2 | length 5.5
  Top Layer w0.4: J1.37 176.871,109.654 177.15,109.375 L3.2 178.153,109.387 178.153,111.546 J1.39

## Polygon pours and split planes (outlines as drawn)
Gnd on Layer 1 "GND_L02_P012" (solid, remove dead copper, pour order 12): 150.4,72.825 181.625,72.825 191.825,83.025 191.825,110.4 192,110.575 177.8,124.775 150.325,124.775 137.825,112.275 137.825,87.625
Gnd on Layer 1 "GND_L02_P010" (solid, remove dead copper, pour order 10): 150.114,126.111 179.07,126.111 191.77,113.411 191.77,82.677 183.261,74.168 151.003,74.168 137.541,87.63 137.668,87.757 137.668,119.761
Gnd on Bottom Layer "GND_L04_P009" (solid, remove dead copper, pour order 9): 136.398,126.111 178.943,126.111 193.675,111.379 193.675,88.9 177.927,73.152 143.248,73.152 134.493,81.907 134.493,92.837
Gnd on Layer 2 "GND_L03_P008" (solid, remove dead copper, pour order 8): 144.653,124.079 178.308,124.079 191.135,111.252 191.135,89.027 175.641,73.533 175.26,73.914 153.416,73.914 139.065,88.265 139.065,104.002
Gnd on Top Layer "GND_L01_P011" (solid, remove dead copper, pour order 11): 151.765,129.413 176.149,129.413 192.659,112.903 192.659,84.455 180.34,72.136 150.622,72.136 136.525,86.233 136.525,105.068

## Keep-outs
Keep-Out Layer:
  lines w0.254: 147.808,95.952 ccw(c166.076,99.173) 151.866,87.249 151.866,79.093 ccw(c166.076,99.173) 180.287,79.093 180.286,87.249 ccw(c166.076,99.173) 184.344,95.952 ; 147.808,102.394 cw(c166.076,99.173) 151.866,111.097 151.866,119.252 ; 151.865,119.253 cw(c166.076,99.173) 180.287,119.253 ; 180.286,111.097 180.286,119.252 ; 180.286,111.099 cw(c166.076,99.175) 184.344,102.396

## Silkscreen, mask and mechanical layers (free items; w line width, h text height)
Bottom Overlay:
  text "CRYO ASIC2 Test adapter v1.0" at 174.125,118.05 h1.02
  text "WUT ISE 2024.02" at 169.825,75.375 h1.02
Mechanical 1:
  circle w0.254: c166.076,99.173 r24.6
Mechanical 2:
  lines w0.254: 144.526,99.173 cw(c166.076,99.173) 152.224,115.681 ; 158.705,78.922 ccw(c166.076,99.173) 173.447,78.922 ; 179.928,115.681 cw(c166.076,99.173) 187.626,99.173